# Altium PCB PCB1.PcbDoc
Units mil, origin at the board's own origin, x right, y up, seen from the top; angles counter-clockwise.
Board outline 6000 x 4000 mil, 2 copper layers (Top Layer, Bottom Layer); 4 components, 26 nets, 60 pads, 0 vias.
Unrouted connection lines stored in the file: 1.
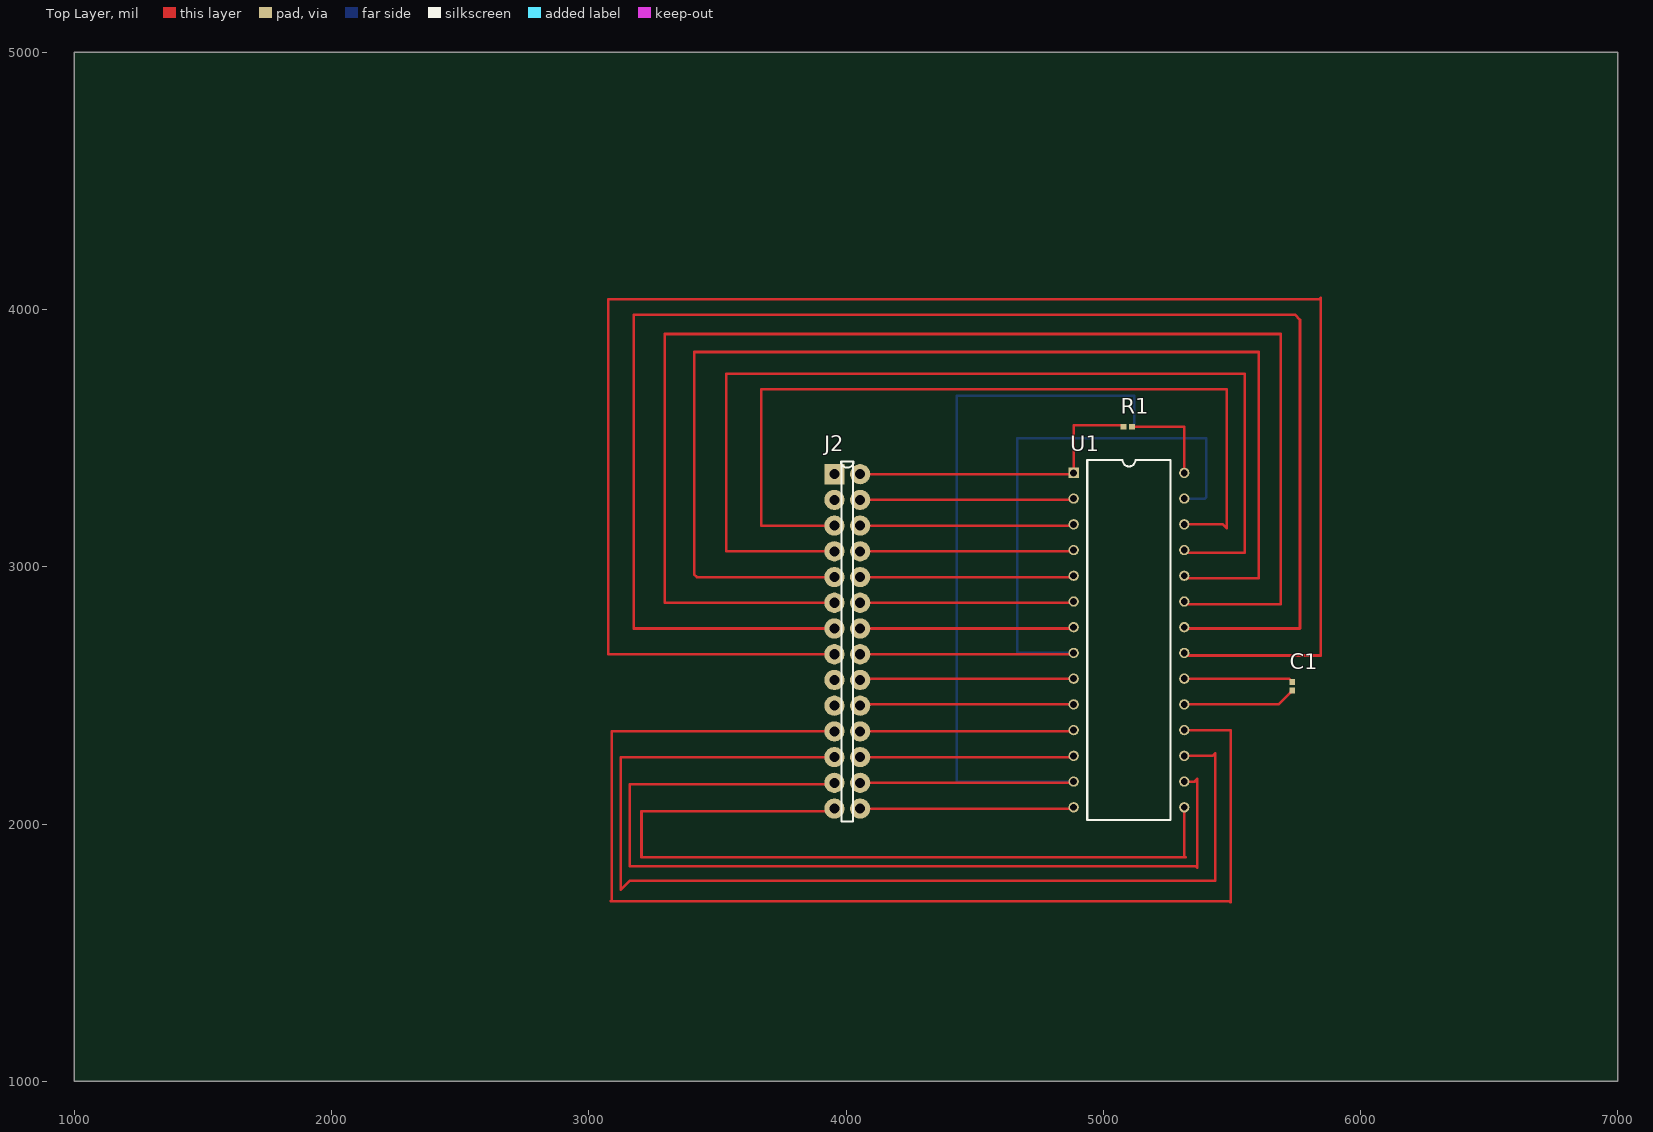
[diagram p0: Top Layer view]
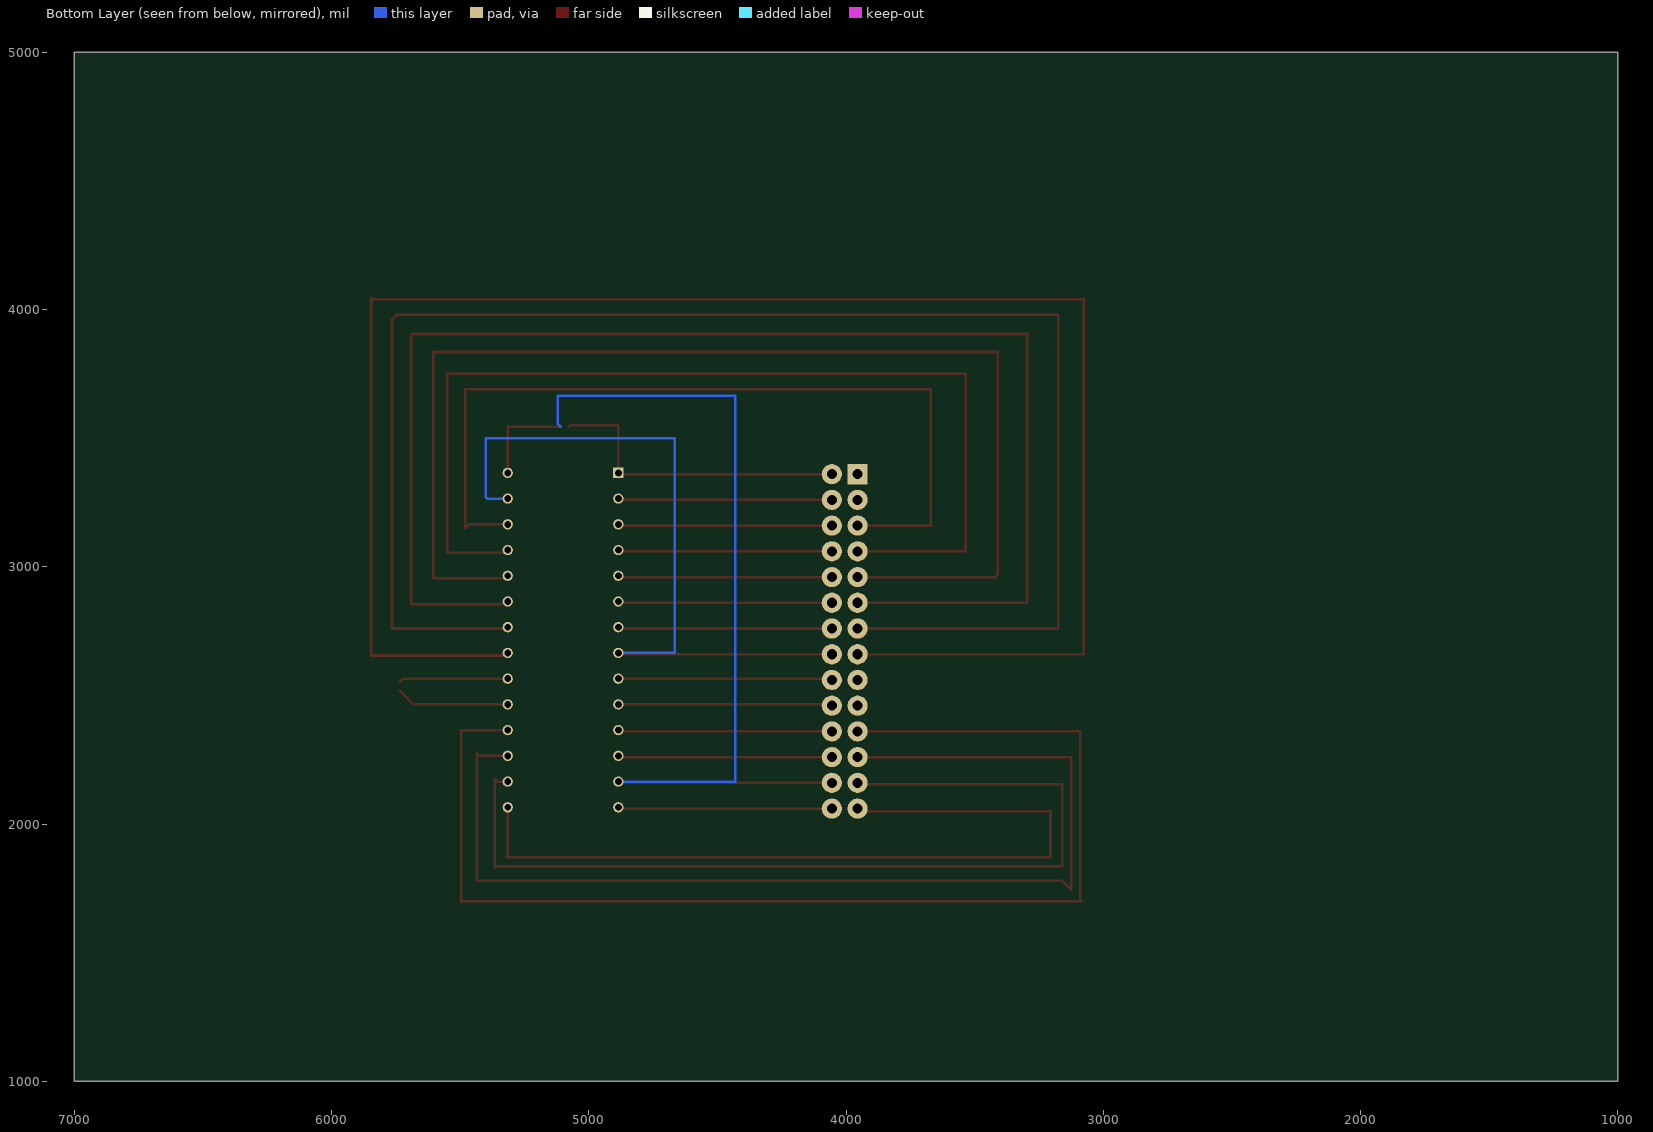
[diagram p1: Bottom Layer view, seen from below]
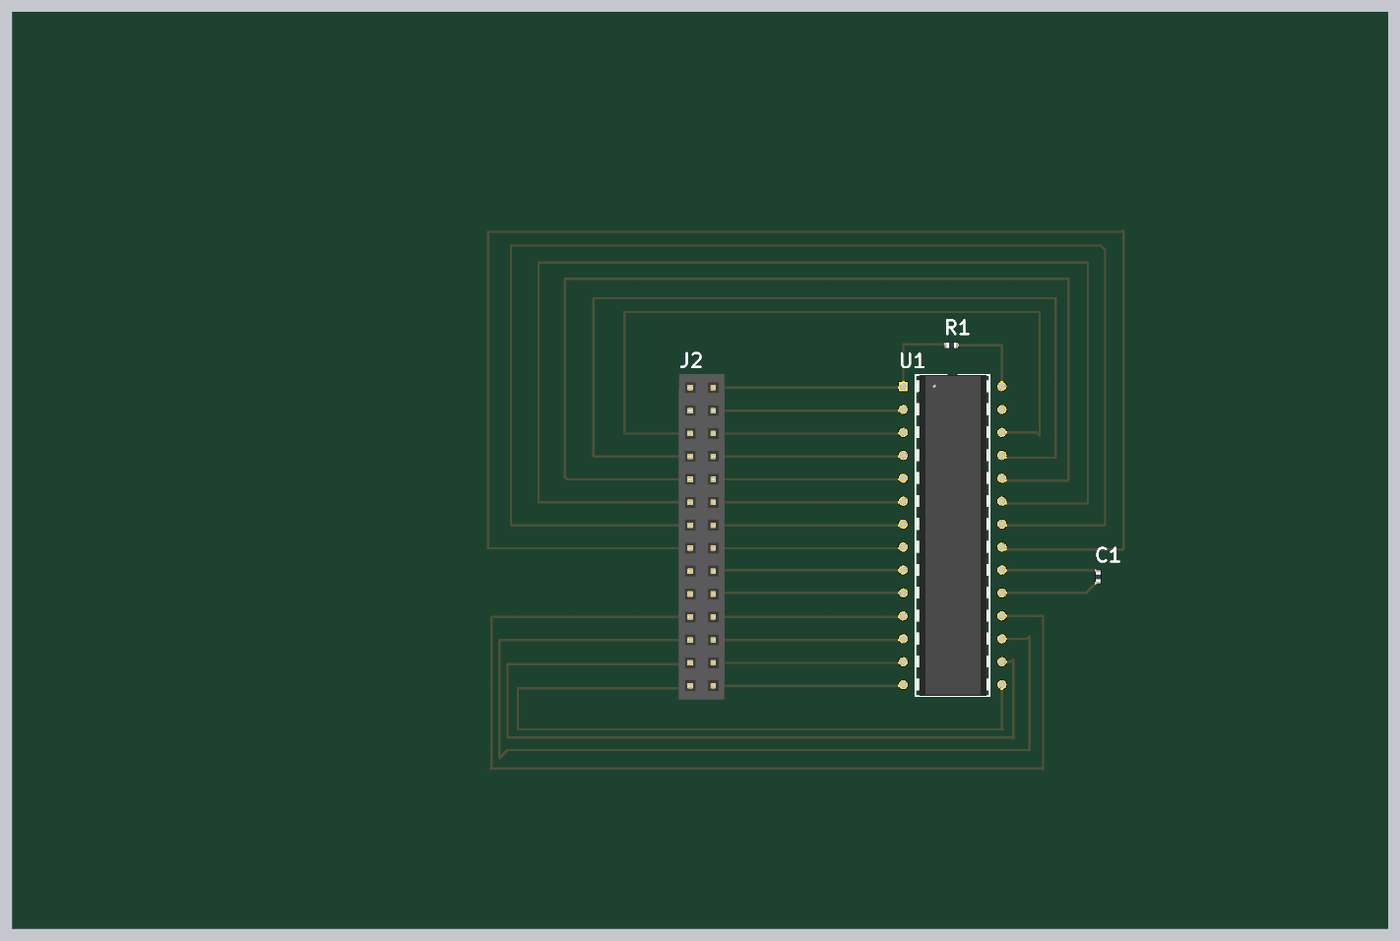
[diagram p2: 3D render of the assembled board from above, using the file's embedded part models]

## Layer stack, top to bottom
Top Solder: solder mask 0.4, Solder Resist, Dk 3.5
Top Layer: signal copper 1.4
Dielectric 1: dielectric 12.6, FR-4, Dk 4.8
Bottom Layer: signal copper 1.4
Bottom Solder: solder mask 0.4, Solder Resist, Dk 3.5

## Board outline
1000,1000 7000,1000 7000,5000 1000,5000

## Design rules (kind name [scope] priority, off if disabled: settings)
Clearance [All] p1: gap=10 ignorepadtopadclearanceinfootprint=FALSE
PolygonConnect [All] p1: connectstyle=Relief reliefconductorwidth=10 reliefentries=4 polygonreliefangle="90 Angle" airgapwidth=10
RoutingVias [All] p1: holewidth=28 width=50 viastyle="Through Hole" minholewidth=28 minwidth=50 maxholewidth=28 maxwidth=50
SolderMaskExpansion [All] p1: expansion=4 istentingtop=FALSE
SupplyNets "Schematic Supply Nets_1" [InNet('+5V')] p1: voltage=0.000
SupplyNets "Schematic Supply Nets" [InNet('GND')] p2: voltage=0.000
Width [All] p1: maxlimit=10 minlimit=10 preferedwidth=10
30 further rules are at their usual default settings.

## Classes and differential pairs
net class GPIOB[5..15]: GPIOB5 GPIOB6 GPIOB7 GPIOB8 GPIOB9 GPIOB10 GPIOB11 GPIOB12 GPIOB13 GPIOB14 GPIOB15
net class GPIOA[0..4]: GPIOA0 GPIOA1 GPIOA2 GPIOA3 GPIOA4

## Components (designator, comment, footprint, x,y, rotation, side; value= is the part's Value field where it differs from the comment)
C1 "CC0603MRX5R6BB106" RC0402JR-0710KL 5735,2535 r270 top value=10uF
J2 "PPTC142LFBN-RC" PPTC142LFBN-RC 3955,3360 r0 top
R1 "RC0402JR-0710KL" RC0402JR-0710KL 5095,3545 r180 top value=10kR
U1 "PIC24FJ64GA002-I/SP" PIC24FJ64GA002-I/SP 4885,3365 r0 top

## Footprints (in the part's own frame and the unit in brackets; to place one, negate y for a bottom-side part, rotate by r counter-clockwise, add the part's x,y. Pads: shape width x height; smd on the part's side, far side on the other; paste and mask are expansions set on the pad)
PIC24FJ64GA002-I/SP [mil]
  rect 40x40 hole 26.77: 1(0,0)
  round 40 hole 26.77: 2(0,-100) 3(0,-200) 4(0,-300) 5(0,-400) 6(0,-500) 7(0,-600) 8(0,-700) 9(0,-800) 10(0,-900) 11(0,-1000) 12(0,-1100) 13(0,-1200) 14(0,-1300) 15(430,-1300) 16(430,-1200) 17(430,-1100) 18(430,-1000) 19(430,-900) 20(430,-800) 21(430,-700) 22(430,-600) 23(430,-500) 24(430,-400) 25(430,-300) 26(430,-200) 27(430,-100) 28(430,0)
  silkscreen extent 53,-1350 377,50, body extent 57,-1349 376,51, height 205
PPTC142LFBN-RC [mm]
  round 2 hole 1: 1(2.54,0) 2(2.54,-2.54) 3(2.54,-5.08) 4(2.54,-7.62) 5(2.54,-10.16) 6(2.54,-12.7) 7(2.54,-15.24) 8(2.54,-17.78) 9(2.54,-20.32) 10(2.54,-22.86) 11(2.54,-25.4) 12(2.54,-27.94) 13(2.54,-30.48) 14(2.54,-33.02) 15(0,-33.02) 16(0,-30.48) 17(0,-27.94) 18(0,-25.4) 19(0,-22.86) 20(0,-20.32) 21(0,-17.78) 22(0,-15.24) 23(0,-12.7) 24(0,-10.16) 25(0,-7.62) 26(0,-5.08) 27(0,-2.54)
  rect 2x2 hole 1: 28(0,0)
  silkscreen extent 0.64,-34.29 1.91,1.27, body extent -1.24,-34.53 3.84,1.53, height 7.89
RC0402JR-0710KL [mm]
  rect 0.6x0.55 smd: 1(-0.425,0) 2(0.425,0)
  body extent -0.53,-0.28 0.53,0.28, height 0.4

## Part data
C1: "Ceramic Capacitor, Multilayer, Ceramic, 10V, 20% +Tol, 20% -Tol, X5R, 15% TC, 10uF, Surface Mount, 0603", Capacitor Type=Ceramic, Case/Package=0603, Manufacturer=Yageo, Max Operating Temperature=85°C, Min Operating Temperature=-55°C, Package Shape=Rectangular, Package Style=SMTMeter, Rated DC Voltage (URdc)=10V, Supplier Part Number=311-1817-1-ND, Temperature Characteristics Code=X5R, Tolerance  (fill in as +-)=20%, Category="Ceramic Capacitors", ComponentLink1Description=https://datasheet.ciiva.com:443/pdfs/VipMasterIC/IC/YAGO/YAGO-S-A0006851646/YAGO-S-A0006851646-1.pdf?src-supplier=IHS+Markit, ComponentLink1URL=https://datasheet.ciiva.com:443/pdfs/VipMasterIC/IC/YAGO/YAGO-S-A0006851646/YAGO-S-A0006851646-1.pdf?src-supplier=IHS+Markit, ComponentLink2Description=http://www.mouser.com/ds/2/447/UPY-GPHC_X5R_4V-to-50V_25-1131599.pdf?src-supplier=Mouser, ComponentLink2URL=http://www.mouser.com/ds/2/447/UPY-GPHC_X5R_4V-to-50V_25-1131599.pdf?src-supplier=Mouser, ComponentLink3Description=http://www.yageo.com/documents/recent/UPY-GPHC_X5R_4V-to-50V_25.pdf?src-supplier=Digikey, ComponentLink3URL=http://www.yageo.com/documents/recent/UPY-GPHC_X5R_4V-to-50V_25.pdf?src-supplier=Digikey, ComponentLink4Description=https://datasheet.octopart.com/CC0603MRX5R6BB106-Yageo-datasheet-158238148.pdf?src-supplier=Newark, ComponentLink4URL=https://datasheet.octopart.com/CC0603MRX5R6BB106-Yageo-datasheet-158238148.pdf?src-supplier=Newark, Dielectric Material=Ceramic, Height=0.8mm, JESD-609 Code=e3, Length=1.6mm, Manufacturer Part Number=CC0603MRX5R6BB106, Mounting Technology="Surface Mount", Multilayer=Yes, Packaging="Tape and Reel", Pins=2, Pricing="1=0.18, 10=0.119, 50=0.0752, 100=0.0602, 500=0.04348, 1000=0.03847 (USD)", Reach SVHC Compliant=Yes, RoHS=Yes, RoHS Compliant=Yes, Stock=192913, Supplier=Digikey, Terminal Finish=Nickel, Termination=Wraparound, Tolerance (fill in as +-)=20%, Width=0.8mm
J2: "Board Connector, 28 Contact(s), 2 Row(s), Female, Straight, 0.1 inch Pitch, Solder Terminal, Locking", Manufacturer=Sullins, Manufacturer Series=PP, Rated Current (Signal)=3A, Supplier Part Number=S7082-ND, Body Breadth=0.197inch, Body Depth=0.334inch, Body Length=1.42inch, Category=Connectors, ComponentLink1Description=https://datasheet.ciiva.com:443/pdfs/VipMasterIC/IC/SUCS/SUCSS00270/SUCSS00270-1.pdf?src-supplier=IHS+Markit, ComponentLink1URL=https://datasheet.ciiva.com:443/pdfs/VipMasterIC/IC/SUCS/SUCSS00270/SUCSS00270-1.pdf?src-supplier=IHS+Markit, ComponentLink2Description=http://sullinscorp.com/catalogs/101_PAGE114-115_.100_FEMALE_HDR.pdf?src-supplier=Digikey, ComponentLink2URL=http://sullinscorp.com/catalogs/101_PAGE114-115_.100_FEMALE_HDR.pdf?src-supplier=Digikey, Connector Type="BOARD CONNECTOR", Contact Finish - Mating=SN, Contact Finish - Termination=TIN, Contact Gender=Female, Contact Material=Bronze, Contact Pattern=RECTANGULAR, Contact Style="SQ PIN-SKT", Insulation Material=Polyester, Manufacturer Part Number=PPTC142LFBN-RC, Mating Contact Pitch=0.1inch, Mating Contact Row Spacing=0.1inch, Mounting Option 1=LOCKING, Mounting Style=STRAIGHT, Mounting Technology=Board, Number Of Connectors=1, Number of Contacts=28, Number Of PCB Rows=2, Number of Rows Loaded=2, PCB Contact Pattern=RECTANGULAR, PCB Contact Row Spacing=2.54mm, Polarization Key="POLARIZED HOUSING", Pricing="1=1.72, 10=1.497, 80=1.33775, 440=1.11475, 1000=0.9555, 5000=0.91 (USD)", Reach SVHC Compliant=Yes, Reference Standard=UL, Reliability=COMMERCIAL, RoHS=Yes, RoHS Compliant=Yes, Stock=2110, Supplier=Digikey, Terminal Length=0.125inch, Terminal Pitch=2.54mm, Termination=Solder
R1: "Fixed Resistor, Metal Glaze/thick Film, 0.0625W, 10000ohm, 50V, 5% +/-Tol, 100ppm/Cel, Surface Mount, 0402", Case/Package=0402, Manufacturer=Yageo, Max Operating Temperature=155°C, Min Operating Temperature=-55°C, Package Height=0.35mm, Package Length=1mm, Package Shape=Rectangular, Package Style=SMTMeter, Package Width=0.5mm, Power=62.5mW, Rated Temperature=70°C, Resistor Type="FIXED RESISTOR", Supplier Part Number=4356762, Temperature Coefficient=100ppm/°C, Tolerance=5%, Working Voltage=50V, Additional Feature="LASER TRIMMABLE", Category="Chip SMD Resistors", ComponentLink1Description=https://datasheet.ciiva.com:443/pdfs/VipMasterIC/IC/YAGO/YAGO-S-A0008145938/YAGO-S-A0008145938-1.pdf?src-supplier=IHS+Markit, ComponentLink1URL=https://datasheet.ciiva.com:443/pdfs/VipMasterIC/IC/YAGO/YAGO-S-A0008145938/YAGO-S-A0008145938-1.pdf?src-supplier=IHS+Markit, ComponentLink2Description=https://datasheet.ciiva.com/7850/1018594-7850136.pdf?src-supplier=Element14, ComponentLink2URL=https://datasheet.ciiva.com/7850/1018594-7850136.pdf?src-supplier=Element14, ComponentLink3Description=https://datasheet.ciiva.com/7850/1018594-7850137.pdf?src-supplier=Element14, ComponentLink3URL=https://datasheet.ciiva.com/7850/1018594-7850137.pdf?src-supplier=Element14, ComponentLink4Description=https://datasheet.ciiva.com/2452/pyu-r-int-thick-7-2452626.pdf?src-supplier=Digikey, ComponentLink4URL=https://datasheet.ciiva.com/2452/pyu-r-int-thick-7-2452626.pdf?src-supplier=Digikey, ComponentLink5Description=https://datasheet.ciiva.com/2452/pyu-r-int-thick-7-2452627.pdf?src-supplier=Digikey, ComponentLink5URL=https://datasheet.ciiva.com/2452/pyu-r-int-thick-7-2452627.pdf?src-supplier=Digikey, ComponentLink6Description=https://datasheet.ciiva.com/2452/pyu-r-int-thick-7-2452628.pdf?src-supplier=Digikey, ComponentLink6URL=https://datasheet.ciiva.com/2452/pyu-r-int-thick-7-2452628.pdf?src-supplier=Digikey, ComponentLink7Description=https://datasheet.ciiva.com/12669/pyu-rc0402-51-rohs-l-6-r-12669687.pdf?src-supplier=Mouser, ComponentLink7URL=https://datasheet.ciiva.com/12669/pyu-rc0402-51-rohs-l-6-r-12669687.pdf?src-supplier=Mouser, Construction=Chip, JESD-609 Code=e3, Manufacturer Part Number=RC0402JR-0710KL, Mounting Technology="Surface Mount", Packaging="Tape and Reel", Pins=2, Pricing="10000=0.0008, 100000=0.0007, 300000=0.0007, 750000=0.0007, 2000000=0.0006 (USD)", Reach SVHC Compliant=Yes, RoHS=Yes, RoHS Compliant=Yes, Stock=3760000, Supplier="Future Electronics", Technology="METAL GLAZE/THICK FILM", Terminal Finish=Nickel, Termination=Wraparound
U1: "Microcontroller, 16-Bit, FLASH, PIC CPU, 32MHz, CMOS, PDIP28", Case/Package=DIP, Clock Frequency=32MHz, Manufacturer=Microchip, Max Operating Temperature=85°C, Max Supply Current=20mA, Max Supply Voltage=3.6V, Min Operating Temperature=-40°C, Min Supply Voltage=2V, Package Body Material=Plastic, Package Equivalence Code=DIP28,.3, Package Shape=Rectangular, Package Style=IN-LINEMeter, Power Supplies=2.5,2.5/3.3V, Supplier Part Number=PIC24FJ64GA002-I/SP-ND, Temperature Grade=INDUSTRIAL, Category=Microcontrollers, ComponentLink1Description=https://datasheet.ciiva.com:443/pdfs/VipMasterIC/IC/MCHP/MCHPS05315/MCHPS05315-1.pdf?src-supplier=IHS+Markit, ComponentLink1URL=https://datasheet.ciiva.com:443/pdfs/VipMasterIC/IC/MCHP/MCHPS05315/MCHPS05315-1.pdf?src-supplier=IHS+Markit, ComponentLink2Description=https://datasheet.ciiva.com/6640/39881d-6640011.pdf?src-supplier=Digikey, ComponentLink2URL=https://datasheet.ciiva.com/6640/39881d-6640011.pdf?src-supplier=Digikey, ComponentLink3Description=https://datasheet.ciiva.com/4839/39714a-75400-4839926.pdf?src-supplier=Mouser, ComponentLink3URL=https://datasheet.ciiva.com/4839/39714a-75400-4839926.pdf?src-supplier=Mouser, ComponentLink4Description=https://datasheet.ciiva.com/16877/70046338-16877117.pdf?src-supplier=Allied+Electronics, ComponentLink4URL=https://datasheet.ciiva.com/16877/70046338-16877117.pdf?src-supplier=Allied+Electronics, ComponentLink5Description=https://datasheet.ciiva.com/16351/filehandler-aspxddocname-en529429-16351639.pdf?src-supplier=Future+Electronics, ComponentLink5URL=https://datasheet.ciiva.com/16351/filehandler-aspxddocname-en529429-16351639.pdf?src-supplier=Future+Electronics, ComponentLink6Description=https://datasheet.ciiva.com/7790/39881d-7790101.pdf?src-supplier=Element14, ComponentLink6URL=https://datasheet.ciiva.com/7790/39881d-7790101.pdf?src-supplier=Element14, ComponentLink7Description=https://datasheet.ciiva.com/29330/651773-da-01-en-ic-mcu-pic24fj64ga002-i-sp-sdip-28-mcp-29330534.pdf?src-supplier=Conrad, ComponentLink7URL=https://datasheet.ciiva.com/29330/651773-da-01-en-ic-mcu-pic24fj64ga002-i-sp-sdip-28-mcp-29330534.pdf?src-supplier=Conrad, Height - Seated (Max)=5.08mm, JESD-30 Code=R-PDIP-T28, JESD-609 Code=e3, Length=34.671mm, Manufacturer Part Number=PIC24FJ64GA002-I/SP, Number of I/O Lines=21, Pins=28, Pricing="1=4.35, 25=3.98, 100=3.6 (USD)", Qualification Status="Not Qualified", Reach SVHC Compliant=Yes, RoHS=Yes, RoHS Compliant=Yes, Speed=32RPM, Stock=1019, Supplier=Digikey, Surface Mount=No, Technology=CMOS, Terminal Finish=Tin, Terminal Form="Through Hole", Terminal Pitch=2.54mm, Terminal Position=DUAL, Width=7.62mm

## Nets (pads, with @x,y where several pads share a name; then routed paths per layer and width w, separated by ;. In a path a pad name is that pad's centre, name@x,y a point inside that pad or via, vN(x,y) a via of type N, cw(c..) or ccw(c..) an arc to the next point about the centre after c; other vN are vias at no path point)
+5V: J2.13 R1.1 U1.13 U1.28 | length 3984.5
  Top Layer w10: J2.13 4880,2160 U1.13 ; R1.1 5315,3545 U1.28
  Bottom Layer w10: U1.13 4430,2165 4430,3665 5120,3665 5120,3555 5110,3545
GND: J2.8 U1.8 U1.27 | length 2939.1
  Top Layer w10: J2.8 4880,2660 U1.8
  Bottom Layer w10: U1.8 4665,2665 4665,3500 5400,3500 5400,3270 5395,3265 U1.27
GPIOA0: J2.2 U1.2 | length 832.1
  Top Layer w10: J2.2 4880,3260 U1.2
GPIOA1: J2.3 U1.3 | length 832.1
  Top Layer w10: J2.3 4880,3160 U1.3
GPIOA2: J2.9 U1.9 | length 832.1
  Top Layer w10: J2.9 4060,2565 U1.9
GPIOA3: J2.10 U1.10 | length 832.1
  Top Layer w10: J2.10 4060,2465 U1.10
GPIOA4: J2.12 U1.12 | length 832.1
  Top Layer w10: J2.12 4880,2260 U1.12
GPIOB0: J2.4 U1.4 | length 832.1
  Top Layer w10: J2.4 4880,3060 U1.4
GPIOB1: J2.5 U1.5 | length 832.1
  Top Layer w10: J2.5 4880,2960 U1.5
GPIOB2: J2.6 U1.6 | length 832.1
  Top Layer w10: J2.6 4880,2860 U1.6
GPIOB3: J2.7 U1.7 | length 832.1
  Top Layer w10: J2.7 4880,2760 U1.7
GPIOB4: J2.11 U1.11 | length 832.1
  Top Layer w10: J2.11 4880,2360 U1.11
GPIOB5: J2.14 U1.14 | length 832.1
  Top Layer w10: J2.14 4880,2060 U1.14
GPIOB6: J2.15 U1.15 | length 3246.2
  Top Layer w10: J2.15 3945,2050 3205,2050 3205,1870 5320,1870 5315,1875 U1.15
GPIOB7: J2.16 U1.16 | length 3723.3
  Top Layer w10: J2.16 3950,2155 3160,2155 3160,1835 5360,1835 5365,1830 5365,2175 5355,2165 U1.16
GPIOB8: J2.17 U1.17 | length 4288.6
  Top Layer w10: J2.17 3125,2260 3125,1745 3160,1780 5435,1780 5435,2275 5425,2265 U1.17
GPIOB9: J2.18 U1.18 | length 4789.1
  Top Layer w10: J2.18 3090,2360 3090,1705 3085,1700 5490,1700 5495,1695 5495,2365 U1.18
GPIOB10: J2.21 U1.21 | length 6956.2
  Top Layer w10: J2.21 3075,2660 3075,4040 5840,4040 5845,4045 5845,2655 5325,2655 U1.21
GPIOB11: J2.22 U1.22 | length 6250.4
  Top Layer w10: J2.22 3175,2760 3175,3980 5745,3980 5765,3960 5765,2760 5320,2760 U1.22
GPIOB12: J2.23 U1.23 | length 5529.1
  Top Layer w10: J2.23 3295,2860 3295,3905 5690,3905 5690,2855 5325,2855 U1.23
GPIOB13: J2.24 U1.24 | length 4783.3
  Top Layer w10: J2.24 3420,2960 3410,2970 3410,3835 5605,3835 5605,2955 5325,2955 U1.24
GPIOB14: J2.25 U1.25 | length 4059.1
  Top Layer w10: J2.25 3535,3060 3535,3750 5550,3750 5550,3055 5325,3055 U1.25
GPIOB15: J2.26 U1.26 | length 3336.2
  Top Layer w10: J2.26 3670,3160 3670,3690 5480,3690 5480,3150 5465,3165 U1.26
MCLR: J2.1 R1.2 U1.1 | length 1240.7
  Top Layer w10: J2.1@4075,3380 J2.1 4880,3360 U1.1 4885,3550 5073.27,3550 R1.2
NetC1_1: C1.1 U1.20 | length 425.5
  Top Layer w10: U1.20 5721.73,2565 C1.1
NetC1_2: C1.2 U1.19 | length 442.1
  Top Layer w10: U1.19 5681.73,2465 C1.2
pads on no net: J2.19 J2.20 J2.27 J2.28